# Altium PCB LM-CT-001.PcbDoc
Units mil, origin at the board's own origin, x right, y up, seen from the top; angles counter-clockwise.
Board outline 591.28 x 2078.8 mil, 4 copper layers (Top Layer, Signal Layer 2, Signal Layer 1, Bottom Layer), stack 30.634 mil thick; 41 components, 44 nets, 161 pads, 28 vias.
Unrouted connection lines stored in the file: 3.
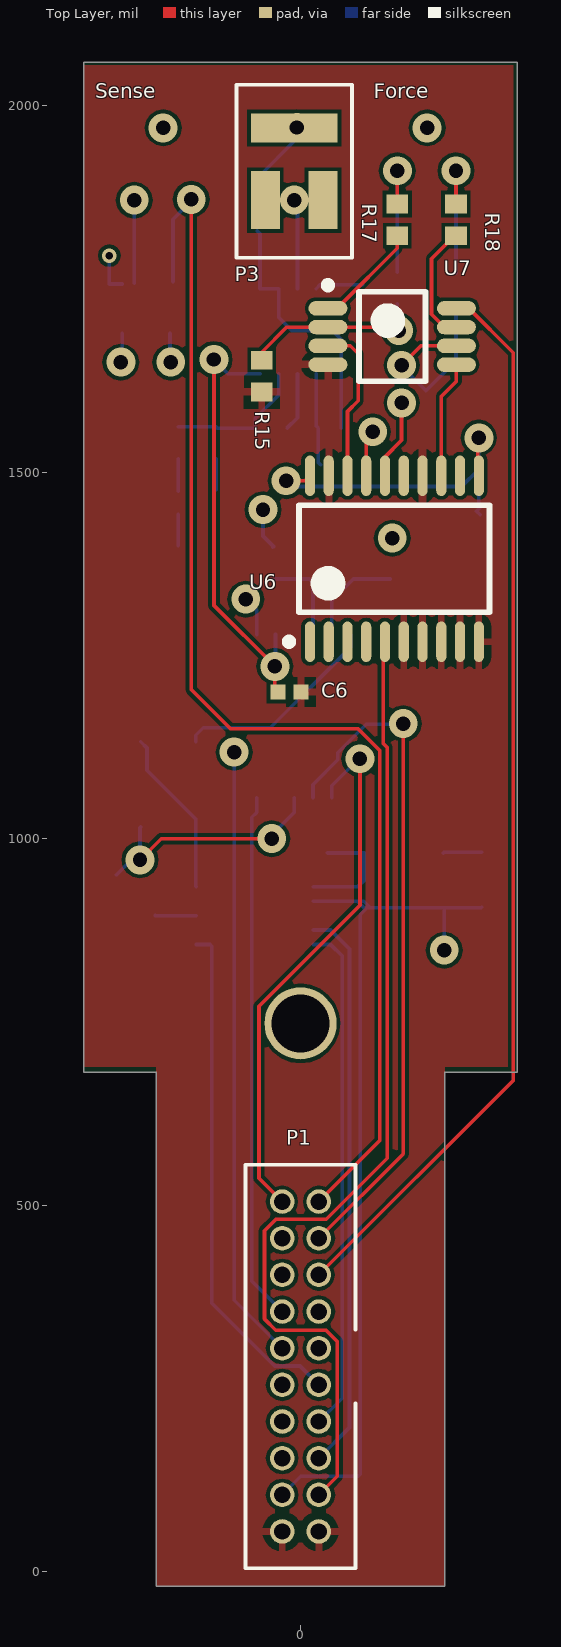
[diagram p0: Top Layer view]
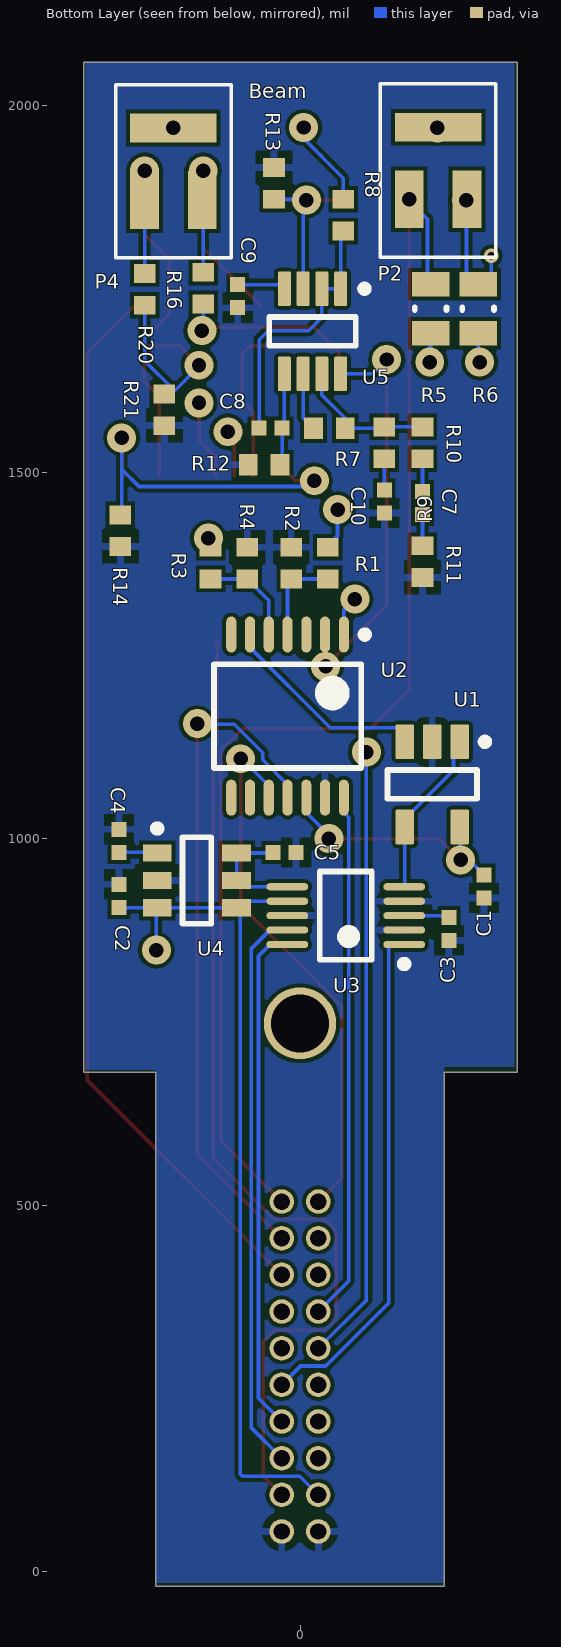
[diagram p1: Bottom Layer view, seen from below]
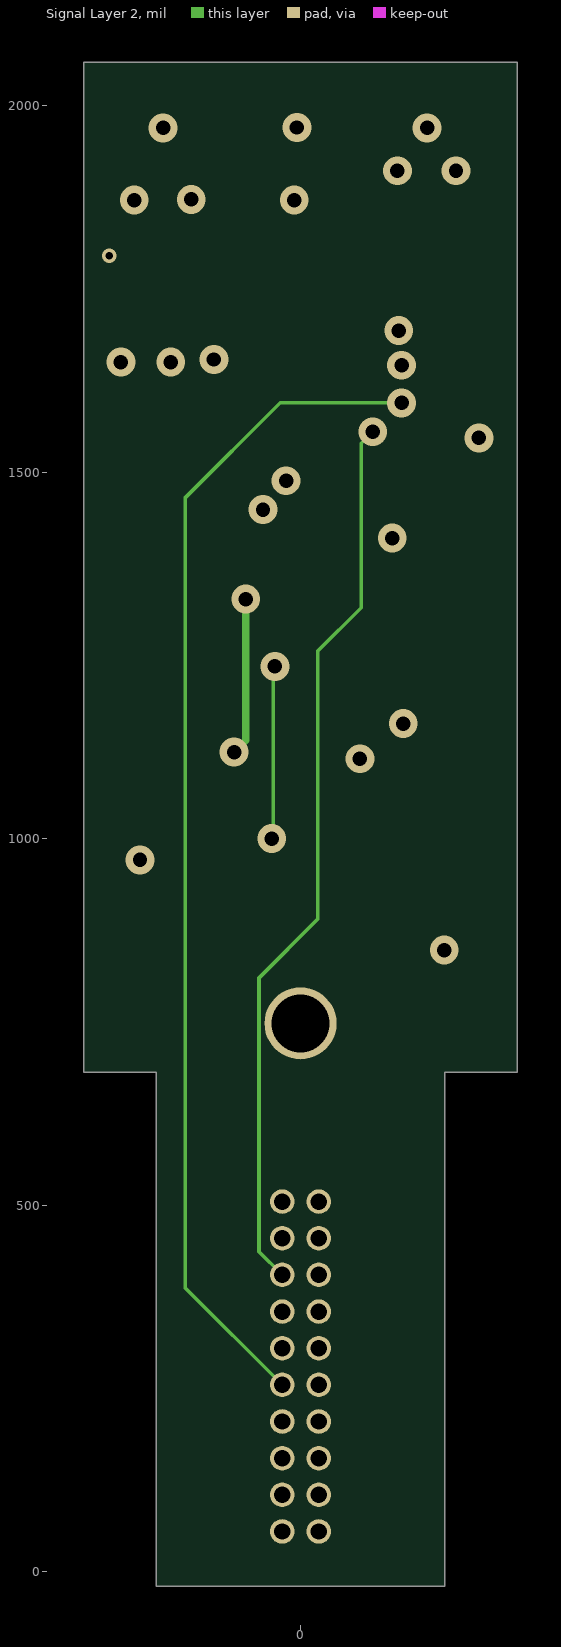
[diagram p2: Signal Layer 2]
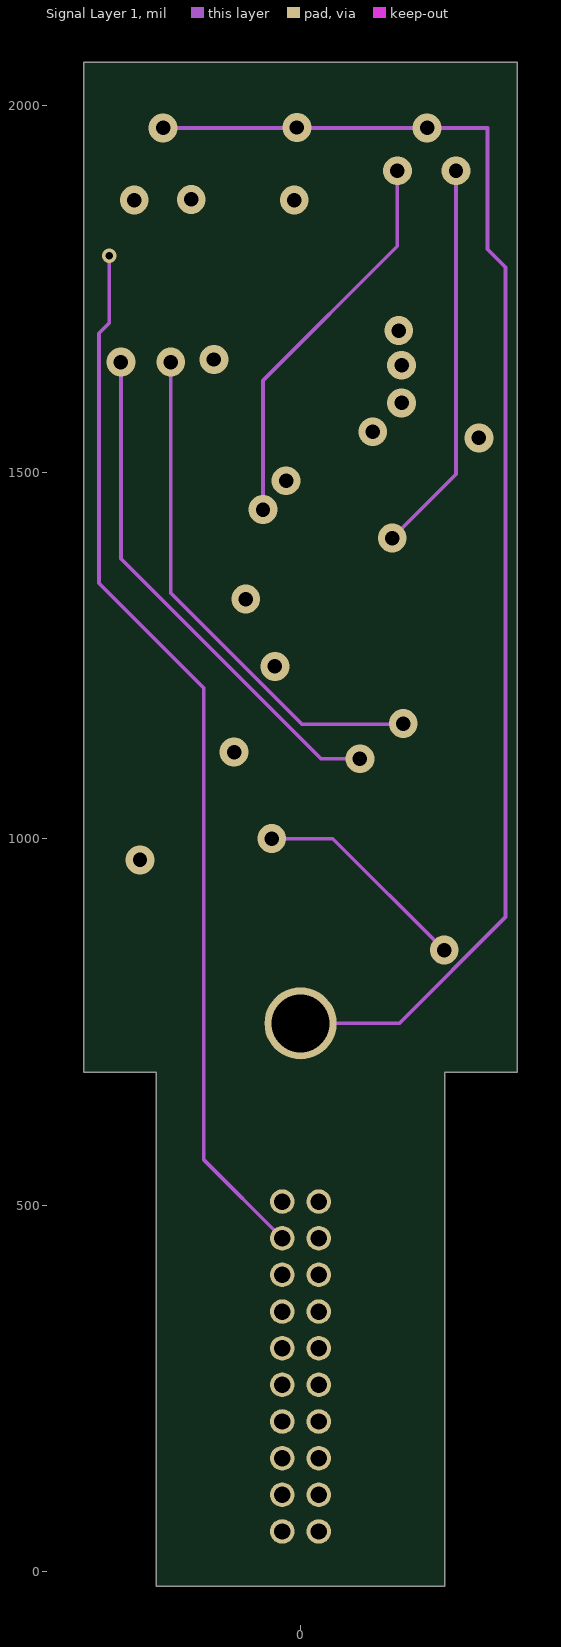
[diagram p3: Signal Layer 1]

## Layer stack, top to bottom
Top Solder: solder mask 0.4, Solder Resist, Dk 3.5
Top Layer: signal copper 1.4
Dielectric 1: core 10, FR-4, Dk 4.2
Signal Layer 2: signal copper 1.417
Dielectric 5: prepreg 5, Dk 4.2
Signal Layer 1: signal copper 1.417
Dielectric 4: core 10, Dk 4.2
Bottom Layer: signal copper 1.4
Bottom Solder: solder mask 0.4, Solder Resist, Dk 3.5

## Board outline
295.28,681.05 196.85,681.05 196.85,-20 -196.85,-20 -196.85,681.05 -296,681.05 -296,2058.8 295.28,2058.8

## Design rules (kind name [scope] priority, off if disabled: settings)
Clearance [All] p1: gap=5 ignorepadtopadclearanceinfootprint=FALSE except(0: Arc-Hole Track-Hole SMDPad-Hole THPad-Hole Via-Hole Fill-Hole Poly-Hole Region-Hole Text-Hole)
HoleToHoleClearance [All] p1: gap=5 allowstackedmicrovias=TRUE
MinimumSolderMaskSliver [All] p1: minsoldermaskwidth=2.5
PolygonConnect [All] p1: connectstyle=Relief reliefconductorwidth=10 reliefentries=4 polygonreliefangle="90 Angle" airgapwidth=10
RoutingVias [All] p1: holewidth=10 width=20 viastyle="Through Hole" minholewidth=5 minwidth=10 maxholewidth=28 maxwidth=50
SilkToSolderMaskClearance [IsPad] p1: minsilkscreentomaskgap=5 clearancetoexposedcopper=TRUE
SolderMaskExpansion [All] p1: expansion=4
Width [All] p1: maxlimit=10 minlimit=5 preferedwidth=10 toplayer_prefwidth=5 bottomlayer_prefwidth=5 minimp=50.000000 maximp=50.000000 favimp=50.000000
27 further rules are at their usual default settings.

## Classes and differential pairs
component class Beam_Amp: C6 C7 C8 C9 C10 P1 P2 P3 R5 R6 R7 R8 R9 R10 R11 R12 R13 U5
component class ADC: C1 C2 C3 C4 C5 R1 R2 R3 R4 U1 U2 U3 U4
component class ZP_Force_Plates: P4 R14 R15 R16 R17 R18 R20 R21 U6 U7

## Components (designator, comment, footprint, x,y, rotation, side; value= is the part's Value field where it differs from the comment)
C1 "0.1uF" CAPC0402(1005)60_L -251,935 r90 bottom
C2 "0.1uF" CAPC0402(1005)60_L 247,922 r270 bottom
C3 "0.1uF" CAPC0402(1005)60_L -203,877 r90 bottom
C4 "0.1uF" CAPC0402(1005)60_L 247,997 r270 bottom
C5 "0.1uF" CAPC0402(1005)60_L 21,981 r180 bottom
C6 "0.1uF" CAPC0402(1005)60_L -15,1200 r180 top
C7 "0.1uF" CAPC0402(1005)60_L -167,1458 r270 bottom
C8 "0.1uF" CAPC0402(1005)60_L 40,1560 r180 bottom
C9 "0.1uF" CAPC0402(1005)60_L 85,1740 r90 bottom
C10 "1uF" CAPC0402(1005)60_L -115,1460 r90 bottom
P1 "FTSH-110-02-F-D-ES" FTSH-110-02-F-D-ES 0,280 r90 top locked
P2 "Triax_Conn" Triax_Conn -149,1872 r180 bottom
P3 "Triax_Conn" Triax_Conn -48,1871 r0 top
P4 "Triax_Conn" Triax_Conn 212,1871 r180 bottom
R1 "100k" RESC0402(1005)_M -38,1375.91 r270 bottom
R2 "10K" RESC0402(1005)_M 12,1375.91 r90 bottom
R3 "100k" RESC0402(1005)_M 122,1375.91 r270 bottom
R4 "10k" RESC0402(1005)_M 72,1375.91 r90 bottom
R5 "100" RESC0805(2012)_L -178,1723 r270 bottom
R6 "100" RESC0805(2012)_L -243,1723 r270 bottom
R7 "" RESC0402(1005)_M -40,1560 r0 bottom
R8 "100" RESC0402(1005)_M -59.06,1850.39 r90 bottom
R9 "" RESC0402(1005)_M -167,1540 r90 bottom
R10 "" RESC0402(1005)_M -115,1540 r270 bottom
R11 "" RESC0402(1005)_M -167,1378 r270 bottom
R12 "" RESC0402(1005)_M 49,1510 r0 bottom
R13 "" RESC0402(1005)_M 35.43,1893.7 r270 bottom
R14 "3.9K" RESC0402(1005)_M 245,1420 r90 bottom
R15 "10k" RESC0402(1005)_M -53,1631 r90 top
R16 "100k" RESC0402(1005)_M 132,1751 r90 bottom
R17 "100" RESC0402(1005)_M 132,1844 r90 top
R18 "100" RESC0402(1005)_M 212,1844 r90 top
R20 "100k" RESC0402(1005)_M 212,1749.35 r90 bottom
R21 "10k" RESC0402(1005)_M 185,1585 r90 bottom
U1 "OPA188AIDBVR" DBV0005A_M -180.39,1074 r270 bottom
U2 "ADG1204YRUZ-REEL7" ADI-RU-14_L 17,1167.16 r270 bottom
U3 "MAX11100EUB+T" U10+2_L -62.39,895 r0 bottom
U4 "MAX6070AAUT41+T" SOT95P280X445-6N 140.61,943 r180 bottom
U5 "OPA2378AIDCNT" DCN0008A_M -17,1692 r270 bottom
U6 "MAX333CWP+" TSOP65P640X90-20N 127.98,1381.79 r90 top
U7 "LT6016" LT6016 125,1685 r0 top

## Footprints (in the part's own frame and the unit in brackets; to place one, negate y for a bottom-side part, rotate by r counter-clockwise, add the part's x,y. Pads: shape width x height; smd on the part's side, far side on the other; paste and mask are expansions set on the pad)
ADI-RU-14_L [mm] "SOP, 14-Leads, Body 5x4.4mm, Pitch 0.65mm, IPC High Density"
  oval 1.25x0.35 smd: 1(-2.825,1.95) 2(-2.825,1.3) 3(-2.825,0.65) 4(-2.825,0) 5(-2.825,-0.65) 6(-2.825,-1.3) 7(-2.825,-1.95) 8(2.825,-1.95) 9(2.825,-1.3) 10(2.825,-0.65) 11(2.825,0) 12(2.825,0.65) 13(2.825,1.3) 14(2.825,1.95)
  silkscreen extent -2.95,-2.55 1.8,2.8, body extent -2.25,-2.55 2.25,2.55, height 1.2
CAPC0402(1005)60_L [mm] "Chip Capacitor, Body 1.0x0.5mm, Height 0.6mm, IPC High Density"
  rect 0.52x0.52 smd: 1(-0.4,0) 2(0.4,0)
  body extent -0.55,-0.3 0.55,0.3, height 0.6
DBV0005A_M [mm] "SOT23, 5-Leads, Body 3.05x1.75mm, Pitch 0.95mm, IPC Low Density"
  rrect15% 1.2x0.65 smd: 1(-1.475,0.95) 2(-1.475,0) 3(-1.475,-0.95) 4(1.475,-0.95) 5(1.475,0.95)
  silkscreen extent -1.6,-1.55 0.5,1.95, body extent -1.42,-1.46 1.42,1.46, height 1.08
DCN0008A_M [mm] "SOT23, 8-Leads, Body 3x1.75mm, Pitch 0.65mm, IPC Low Density"
  rrect22% 1.2x0.45 smd: 1(-1.475,0.975) 2(-1.475,0.325) 3(-1.475,-0.325) 4(-1.475,-0.975) 5(1.475,-0.975) 6(1.475,-0.325) 7(1.475,0.325) 8(1.475,0.975)
  silkscreen extent -1.6,-1.5 0.5,1.92, body extent -0.88,-1.5 0.87,1.5, height 1.45
FTSH-110-02-F-D-ES [mm] "CONN HEADER VERT 20POS 1.27MM"
  round 0.85 hole 0.57: 1(-5.715,-0.635) 2(-5.715,0.635) 3(-4.445,-0.635) 4(-4.445,0.635) 5(-3.175,-0.635) 6(-3.175,0.635) 7(-1.905,-0.635) 8(-1.905,0.635) 9(-0.635,-0.635) 10(-0.635,0.635) 11(0.635,-0.635) 12(0.635,0.635) 13(1.905,-0.635) 14(1.905,0.635) 15(3.175,-0.635) 16(3.175,0.635) 17(4.445,-0.635) 18(4.445,0.635) 19(5.715,-0.635) 20(5.715,0.635)
  silkscreen extent -6.98,-1.9 6.99,1.91, body extent -7.33,-2.44 7.49,2.34, height 4.52
LT6016 [mm]
  oval 1.35x0.5 smd: 1(-2.225,0.975) 2(-2.225,0.325) 3(-2.225,-0.325) 4(-2.225,-0.975) 5(2.225,-0.975) 6(2.225,-0.325) 7(2.225,0.325) 8(2.225,0.975)
  silkscreen extent -2.35,-1.55 1.15,1.9, body extent -2.45,-1.55 2.45,1.55, height 1.1
RESC0402(1005)_M [mm] "Chip Resistor, Body 1.0x0.5mm, IPC Low Density"
  rect 0.65x0.75 smd: 1(-0.55,0) 2(0.55,0)
  body extent -0.52,-0.28 0.53,0.28, height 0.4
RESC0805(2012)_L [mm] "Chip Resistor, Body 2.0x1.3mm, IPC High Density"
  rect 0.85x1.3 smd: 1(-0.85,0) 2(0.85,0)
  silkscreen extent -0.05,-0.55 0.05,0.55, body extent -1.1,-0.67 1.1,0.68, height 0.7
SOT95P280X445-6N [mm] "SOT23, 6-Leads, Body 2.90x2.80mm, Pitch 0.95mm, IPC Medium Density"
  rect 1x0.6 smd: 1(-1.375,0.95) 2(-1.375,0) 3(-1.375,-0.95) 4(1.375,-0.95) 5(1.375,0) 6(1.375,0.95)
  silkscreen extent -1.5,-1.5 0.5,1.92, body extent -2.11,-1.78 2.11,1.73, height 1.08
Triax_Conn [mm] "Triaxial pads for Conning Tower"
  rect 1x2 smd: 1(0,0) 2(2,0)
  rect 3x1 smd: 3(1,2.5)
  silkscreen extent -1,-2 3,4
TSOP65P640X90-20N [mm] "TSOP, 20-Leads, Body 6.50x4.40mm, Pitch 0.65mm, IPC Medium Density"
  oval 1.4x0.35 smd: 1(-2.875,2.925) 2(-2.875,2.275) 3(-2.875,1.625) 4(-2.875,0.975) 5(-2.875,0.325) 6(-2.875,-0.325) 7(-2.875,-0.975) 8(-2.875,-1.625) 9(-2.875,-2.275) 10(-2.875,-2.925) 11(2.875,-2.925) 12(2.875,-2.275) 13(2.875,-1.625) 14(2.875,-0.975) 15(2.875,-0.325) 16(2.875,0.325) 17(2.875,0.975) 18(2.875,1.625) 19(2.875,2.275) 20(2.875,2.925)
  silkscreen extent -3,-3.3 1.85,3.77, body extent -2.25,-3.3 2.25,3.3, height 0.9
U10+2_L [mm] "TSSOP, 10-Leads, Body 3x3mm, Pitch 0.5mm, IPC High Density"
  oval 1.45x0.25 smd: 1(-2.025,1) 2(-2.025,0.5) 3(-2.025,0) 4(-2.025,-0.5) 5(-2.025,-1) 6(2.025,-1) 7(2.025,-0.5) 8(2.025,0) 9(2.025,0.5) 10(2.025,1)
  silkscreen extent -2.15,-1.52 0.9,1.8, body extent -1.55,-1.55 1.55,1.55, height 1.1

## Part data
C1 C2 C3 C4 C5 C6 C7 C8 C9 C10: library part CMP-1034-00252-1, "CAP CER 0.1UF 10V X7R 0402", Manufacturer="Murata Electronics North America", Manufacturer Part Number=GRM155R71A104KA01D, Operating Temperature="-55°C ~ 125°C", Package / Case="0402 (1005 Metric)", Ratings=-, Supplier Part Number 1=490-6321-1-ND, Temperature Coefficient=X7R, Tolerance=±10%, Voltage - Rated=10V, Applications="General Purpose", Category=Capacitors, ComponentLink1Description=http://www.murata.com/~/media/webrenewal/support/library/catalog/products/capacitor/mlcc/c02e.ashx?la=en-us, ComponentLink1URL=http://www.murata.com/~/media/webrenewal/support/library/catalog/products/capacitor/mlcc/c02e.ashx?la=en-us, Features=-, Height - Seated (Max)=-, Lead Spacing=-, Mounting Type="Surface Mount, MLCC", Packaging="Cut Tape (CT)", Part Status=Active, Pricing 1="1=0.1, 10=0.014, 100=0.0063, 500=0.00446, 1000=0.00351, 2500=0.00319, 5000=0.00293 (USD)", RoHS="RoHS Compliant", Size / Dimension="0.039\" L x 0.020\" W (1.00mm x 0.50mm)", Stock 1=2920395, Supplier 1=Digi-Key, Thickness (Max)="0.022\" (0.55mm)"
R1 R2 R3 R4 R7 R8 R9 R10 R11 R12 R13 R14 R15 R16 R17 R18 R20 R21: library part CMP-1011-00463-1
R5 R6: library part CMP-1013-00215-1, "RES SMD 100 OHM JUMPER 1/8W 0805"
U1: library part CMP-0809-00005-2, "Precision, Low Noise, Rail-to-Rail Output, Zero-Drift Operational Amplifier, 4 to 36 V, -40 to 125 degC, 5-pin SOT23 (DBV5), Green (RoHS & no Sb/Br)", Case/Package=SOT-23-5, Input Bias Current=160pA, Input Offset Voltage (Vos)=6uV, Input Voltage Noise Density="8.8nV/sqrt Hz", Manufacturer="Texas Instruments", Max Dual Supply Voltage=18V, Max Operating Temperature=125°C, Max Supply Voltage=36V, Min Dual Supply Voltage=2V, Min Operating Temperature=-40°C, Min Supply Voltage=4V, Nominal Supply Current=510uA, Operating Supply Current=450uA, Output Current per Channel=18mA, Package Quantity=3000, Power Supply Rejection Ratio (PSRR)=142dB, Voltage Gain=136dB, Common Mode Rejection Ratio=120dB, ComponentLink1Description=https://datasheet.ciiva.com/24017/opa188-372986-24017253.pdf, ComponentLink1URL=https://datasheet.ciiva.com/24017/opa188-372986-24017253.pdf, ComponentLink2Description=https://datasheet.ciiva.com/18622/opa188-18622375.pdf, ComponentLink2URL=https://datasheet.ciiva.com/18622/opa188-18622375.pdf, Contact Plating=Nickel,Gold, Gain Bandwidth Product=2MHz, Lead Free="Lead Free", Manufacturer Part Number=OPA188AIDBVR, Nominal Gain Bandwidth Product=2MHz, Number of Channels=1, Number of Circuits=1, Number of Elements=1, Number of Pins=5, Packaging="Tape and Reel", Pricing 1="1=2.1871, 10=1.943, 25=1.9086, 100=1.5565, 250=1.5371, 500=1.3168, 1000=1.2243 (USD)", Slew Rate=0.8V/µs, Stock 1=95, Supplier 1=Arrow, Supplier Part Number 1=OPA188AIDBVR, Unity Gain Bandwidth Product=2MHz
U2: library part CMP-0793-00109-1, "Low Capacitance, Low Charge Injection, +/-15 V / +12 V, 4:1 iCMOS Multiplexer, 120 Ohm Ron, 14-pin SOP (RU-14), Reel", Base Part Number=MAX11100, Manufacturer="Maxim Integrated", Manufacturer Part Number=MAX11100EUB+, Operating Temperature="-40°C ~ 85°C", Package / Case="10-TFSOP, 10-MSOP (0.118\", 3.00mm Width)", Supplier Device Package=10-uMAX, Supplier Part Number 1=MAX11100EUB+-ND, Voltage - Supply, Analog=5V, Voltage - Supply, Digital="2.7 V ~ 5.25 V", Architecture=SAR, Category="Integrated Circuits (ICs)", ComponentLink1Description=https://datasheets.maximintegrated.com/en/ds/MAX11100.pdf, ComponentLink1URL=https://datasheets.maximintegrated.com/en/ds/MAX11100.pdf, Configuration=S/H-ADC, Data Interface=SPI, Features=-, Input Type="Single Ended", Number of Bits=16, Number of Inputs=1, Packaging=Tube, Part Status=Active, Pricing 1="1=5.98, 10=5.855 (USD)", Ratio - S/H:ADC=1:1, Reference Type=External, RoHS="RoHS Compliant", Sampling Rate (Per Second)=200k, Stock 1=927, Supplier 1=Digi-Key
U3: library part CMP-0249-00017-1, "16-Bit, +5V, 200ksps ADC with 10uA Shutdown, 10-Pin uMAX, -40°C to +85°C, Pb-Free, Tape and Reel", Base Part Number=MAX11100, Manufacturer="Maxim Integrated", Manufacturer Part Number=MAX11100EUB+, Operating Temperature="-40°C ~ 85°C", Package / Case="10-TFSOP, 10-MSOP (0.118\", 3.00mm Width)", Supplier Device Package=10-uMAX, Supplier Part Number 1=MAX11100EUB+-ND, Voltage - Supply, Analog=5V, Voltage - Supply, Digital="2.7 V ~ 5.25 V", Architecture=SAR, Category="Integrated Circuits (ICs)", ComponentLink1Description=https://datasheets.maximintegrated.com/en/ds/MAX11100.pdf, ComponentLink1URL=https://datasheets.maximintegrated.com/en/ds/MAX11100.pdf, Configuration=S/H-ADC, Data Interface=SPI, Features=-, Input Type="Single Ended", Number of Bits=16, Number of Inputs=1, Packaging=Tube, Part Status=Active, Pricing 1="1=5.98, 10=5.855 (USD)", Ratio - S/H:ADC=1:1, Reference Type=External, RoHS="RoHS Compliant", Sampling Rate (Per Second)=200k, Stock 1=927, Supplier 1=Digi-Key
U4: "IC VREF SERIES 4.096V SOT23", Current - Supply=350µA, Manufacturer="Maxim Integrated", Operating Temperature="-40°C ~ 125°C (TA)", Package / Case=SOT-23-6, Supplier Part Number 1=MAX6070AAUT41+TCT-ND, Temperature Coefficient=6ppm/°C, Tolerance=±0.04%, Voltage - Input="4.3 V ~ 5.5 V", Voltage - Output (Min/Fixed)=4.096V, Category="Integrated Circuits (ICs)", ComponentLink1Description=https://datasheets.maximintegrated.com/en/ds/MAX6070-MAX6071.pdf, ComponentLink1URL=https://datasheets.maximintegrated.com/en/ds/MAX6070-MAX6071.pdf, Manufacturer Part Number=MAX6070AAUT41+T, Mounting Type="Surface Mount", Noise - 0.1Hz to 10Hz=9.6µVp-p, Noise - 10Hz to 10kHz=9µVrms, Output Type=Fixed, Packaging="Cut Tape (CT)", Part Status=Active, Pricing 1="1=3.41, 10=3.213, 25=2.5704, 50=2.4418, 100=2.2491, 250=2.13344, 500=2.05634 (USD)", Reference Type=Series, RoHS="RoHS Compliant", Stock 1=2623, Supplier 1=Digi-Key, Supplier Device Package=SOT-23-6
U5: library part CMP-0272-01124-3, "Low-Noise, 900 kHz, RRIO, Precision Operational Amplifier, Zero-Drift Series, 2.2 to 5.5 V, -40 to 125 degC, 8-pin SOP (DCN8), Green (RoHS & no Sb/Br)", Manufacturer="Texas Instruments", Total Supply Voltage(Max)(+5V is 5, +/-5V is 10)=5.5, Total Supply Voltage(Min)(+5V is 5, +/-5V is 10)=2.2, CMRR(Min)(dB)=100, Code_JEDEC=MO-178, ComponentLink1Description="Manufacturer URL", ComponentLink1URL=http://www.ti.com/, ComponentLink2Description=Datasheet, ComponentLink2URL=http://www.ti.com/general/docs/lit/getliterature.tsp?genericPartNumber=OPA2378&fileType=pdf, ComponentLink3Description="Package Specification", ComponentLink3URL=http://www.ti.com/lit/ml/mpds099c/mpds099c.pdf, DatasheetVersion=SBOS417D, Eco-Plan="Green (RoHS & no Sb/Br)", IIB(Max)(pA)=550, Iq per channel(Max)(mA)=0.15, Mounting Technology="Surface Mount", Number of Channels=2, Offset Drift(Typ)(uV/C)=0.25, PackageDescription="8-Pin Plastic Small Outline, Body 1.6 x 2.9 mm, Pitch 0.65 mm", PackageReference=DCN0008A, PackageVersion="4202106/D, 11/2009", PartId=1, PartNumber=OPA2378AIDCNT, Slew Rate(Typ)(V/us)=0.4, Sub Family="Low Offset Voltage Amplifier (<=500uV), Low Power Amp (<=500uA), Low Supply Voltage Amplifier (<=2.7V), Precision Amplifier, Zero Drift Precision Amplifier", Vio (25C)(Max)(mV)=0.07, Vn at 1kHz(Typ)(nV/rtHz)=20
U6: "IC SWITCH QUAD SPDT 20TSSOP", Case/Package=TSSOP, Dual Supply Voltage=15V, Manufacturer=Maxim, Manufacturer Part Number=MAX333AEUP+, Max Dual Supply Voltage=20V, Max Operating Temperature=85°C, Max Power Dissipation=559mW, Max Supply Current=250uA, Max Supply Voltage=30V, Min Dual Supply Voltage=4.5V, Min Operating Temperature=-40°C, Min Supply Voltage=10V, On-State Resistance=35R, Operating Supply Current=1uA, Package Quantity=74, Supplier Part Number 1=700-MAX333AEUP, ComponentLink1Description=https://datasheet.ciiva.com/2978/max333a-2978850.pdf, ComponentLink1URL=https://datasheet.ciiva.com/2978/max333a-2978850.pdf, ComponentLink2Description=https://datasheet.ciiva.com/30478/0900766b81253c85-30478260.pdf, ComponentLink2URL=https://datasheet.ciiva.com/30478/0900766b81253c85-30478260.pdf, ComponentLink3Description=https://datasheet.ciiva.com/1674/max333a-1674617.pdf, ComponentLink3URL=https://datasheet.ciiva.com/1674/max333a-1674617.pdf, ComponentLink4Description=https://datasheet.ciiva.com/26825/max333aeup-26825546.pdf, ComponentLink4URL=https://datasheet.ciiva.com/26825/max333aeup-26825546.pdf, Height=0.95mm, Lead Free="Lead Free", Length=6.6mm, Number of Bits=4, Number of Channels=4, Number of Pins=20, Packaging=Rail/Tube, Pricing 1="1=6.77, 10=6.43, 50=5.8, 100=5.8, 1000=5.62, 10000=5.62 (USD)", Radiation Hardening=No, REACH SVHC=Unknown, Stock 1=664, Supplier 1=Mouser, Supply Type=Single,Dual, Throw Configuration=SPDT, Turn-Off Delay Time=145ns, Turn-On Delay Time=175ns, Weight=0.006737oz, Width=4.5mm
U7: "IC OPAMP GP 3.3MHZ RRO 8MSOP", Supplier Part Number 1=LT6016IMS8#PBF, Supplier 1=Arrow

## Free pads (board coordinates)
  round 98.43 hole 78.74: 3(0,748.03)

## Via types
v1: diameter 39.37, hole 19.68, Top Layer to Bottom Layer, 27 vias
v2: diameter 20, hole 10, Top Layer to Bottom Layer, 1 vias

## Nets (pads, with @x,y where several pads share a name; then routed paths per layer and width w, separated by ;. In a path a pad name is that pad's centre, name@x,y a point inside that pad or via, vN(x,y) a via of type N, cw(c..) or ccw(c..) an arc to the next point about the centre after c; other vN are vias at no path point)
+3.3: C3.2 U3.3 | length 56
  Bottom Layer w5: C3.2@-198,895.25 -197.75,895 U3.3
+5: C1.2 C2.2 C6.2 P1.4 U1.5 U2.2 U2.12 U3.7 U4.3 U4.4 U5.8 | length 2708.5
  Top Layer w5: v1(-219,971) -190,1000 v1(-39.37,1000) ; v1(-118.11,1653.54) -118.11,1318.11 v1(-35,1235) -35,1204.25 C6.2
  Signal Layer 1 w5: v1(-39.37,1000) 44,1000 v1(196,848)
  Signal Layer 2 w5: v1(-39.37,1000) -37.19,1002.18 -37.19,1237.19 -39.37,1239.37 v1(-35,1235)
  Bottom Layer w5: C1.2 -237.32,964.42 -225.58,964.42 v1(-219,971) -219,1014.72 U1.5 ; v1(-118.11,1653.54) -98.5,1633.93 U5.8 ; v1(-39.37,1000) -39.37,1005.07 -8.59,1035.84 U2.12 ; v1(-35,1235) -34.18,1235.82 U2.2 ; P1.4 0.2,130.2 78.5,130.2 81.43,133.13 81.43,896.29 90.74,905.6 U4.4@95.24,905.6 ; U3.7 U4.4@77.39,914.68 ; v1(196,848) 196,904.34 U4.3 ; C2.2@247,906.41 246.19,905.6 U4.3 ; U4.4@77.39,914.68 U4.4 U4.4@95.24,905.6 ; U4.4@77.39,914.68 86.16,914.68 U4.4@95.24,905.6 ; U4.4@95.24,905.6 U4.3
+12: P1.10 U6.16 | length 1722.4
  Top Layer w5: U6.16 115.19,1520.7 137.8,1543.31 v1(137.8,1594.49)
  Signal Layer 2 w5: P1.10 -157.48,387.48 -157.48,1464.57 -27.56,1594.49 v1(137.8,1594.49)
-5: C9.2 P1.3 U5.4 U6.5 | length 1434
  Top Layer w5: P1.3 50.16,130.16 50.16,314.11 34.73,329.54 -33.81,329.54 -49.23,344.96 -49.23,465.04 -33.51,480.76 35.04,480.76 118.19,563.91 118.19,1124.4 112.81,1129.77 112.81,1266.22 U6.5
  Bottom Layer w5: U5.4 27.06,1755.75 C9.2
A0: P1.12 U2.1 | length 1110.1
  Signal Layer 2 w10: v1(-90.55,1118.11) -74.8,1133.86 v1(-74.8,1326.77)
  Bottom Layer w5: v1(-90.55,1118.11) -90.55,370.55 P1.12 ; v1(-74.8,1326.77) -59.77,1311.74 U2.1
A1: P1.14 U2.14 | length 721
  Bottom Layer w5: U2.14 -59.77,1035.84 -66.56,1029.06 -66.56,396.56 P1.14
"ADC REF": C5.1 U3.6 U4.5 U4.6 | length 160.1
  Bottom Layer w5: U3.6 77.84,934.37 U4.5 U4.6 37.35,980.4 C5.1
Analog_Mux_Out: U1.3 U2.6 | length 287.4
  Bottom Layer w5: U1.3 -142.99,1140.98 -132.7,1151.27 -41.21,1151.27 68.18,1260.66 U2.6
BEAM: C7.2 R11.1 | length 42.6
  Bottom Layer w5: R11.1@-167,1399.66 C7.2
Beam_In: P3.1 P3.2 R13.2 U5.3 | length 246
  Top Layer w5: P3.1 v1(-8.63,1871) P3.2
  Bottom Layer w5: U5.3 -4.2,1866.57 v1(-8.63,1871) -7.58,1872.05 R13.2
BFP: U6.13 U7.5 | length 160.2
  Top Layer w5: U6.13 191.96,1603.24 212.6,1623.88 U7.5
"Bottom Forcing Plate Force": R18.1 U7.7 | length 163.5
  Top Layer w5: R18.1 210.03,1822.35 178.52,1790.84 178.52,1715.14 195.87,1697.79 U7.7
"Bottom Forcing Plate Sense": P4.1 R3.1 R18.2 R20.2 | length 722.4
  Top Layer w5: R18.2 v1(212,1911)
  Signal Layer 1 w5: v1(125,1410) 212,1497 v1(212,1911)
  Bottom Layer w5: R20.2 v1(212,1911)
CT_CS0: P1.5 U3.9 | length 771.9
  Bottom Layer w5: U3.9 40.95,875.31 66.71,849.56 66.71,196.71 P1.5
GND: C1.1 C2.1 C3.1 C4.1 C5.2 C6.1 C9.1 C10.1 P1.1 P1.2 R2.2 R4.2 R11.2 R12.2 R13.1 R14.1 R15.1 R21.1 U1.2 U2.3 U2.13 U3.2 U3.4 U3.8 U4.2 U6.6 U6.7 U6.8 U6.9 U6.10 U6.14 U6.19 U7.4
Guard: P2.3 P3.3 P4.3 pad.3 R8.2 | length 1973.8
  Signal Layer 1 w5: v1(-187.37,1969.42) v1(172.63,1969.43) 254.98,1969.43 254.98,1804.07 279.53,1779.53 279.53,893.08 134.48,748.03 pad.3
  Bottom Layer w5: R8.2 -59.06,1900.95 v1@-5,1955
  other v1: -5,1970
NetC4_2: C4.2 U4.1 | length 52.6
  Bottom Layer w5: U4.1 195.59,981.25 C4.2
NetC7_1: C7.1 R9.1 | length 44.6
  Bottom Layer w5: C7.1 R9.1
NetC8_1: C8.1 R8.1 U5.1 U5.2 | length 363.6
  Bottom Layer w5: R8.1 -55.38,1825.07 U5.1 U5.2 -29.79,1710.9 -11.81,1692.91 43.31,1692.91 55.75,1680.47 C8.1
NetC8_2: C8.2 R12.1 U5.5 | length 126.4
  Bottom Layer w5: U5.5 21.39,1562.86 C8.2 24.25,1513.09 R12.1
NetC10_2: C10.2 R10.2 | length 42.6
  Bottom Layer w5: C10.2 R10.2
NetR1_2: R1.2 R2.1 U2.4 | length 127.9
  Bottom Layer w5: R1.2 R2.1 17,1349.25 U2.4
NetR3_2: R3.2 R4.1 U2.5 | length 138.1
  Bottom Layer w5: U2.5 42.59,1324.84 R4.1 R3.2
NetR7_1: R7.1 R9.2 R10.1 U5.7 | length 193.2
  Bottom Layer w5: R9.2 R10.1 -113.35,1560 R7.1 -61.65,1573.34 -29.79,1605.2 U5.7
NetR7_2: R7.2 U5.6 | length 79.8
  Bottom Layer w5: R7.2 -4.2,1574.14 U5.6
NetR14_2: R14.2 U6.11 U6.20 | length 485.5
  Top Layer w5: v1(-19.69,1488.19) 6.04,1488.19 U6.20 ; U6.11 240,1494.98 241.57,1496.55 241.57,1548.43 v1(243.29,1546.71)
  Bottom Layer w5: v1(-19.69,1488.19) -19.69,1480.31 219.66,1480.31 243.29,1503.94 ; v1(243.29,1546.71) 243.29,1453.37 245,1451.65 240,1446.65 R14.2
NetR15_2: R15.2 R16.1 U7.2 | length 264.3
  Top Layer w5: R15.2@-51.23,1654.42 R15.2 -53,1663.53 -18.74,1697.79 U7.2 128.98,1697.79 v1(133.86,1692.91) v1@127.06,1692.91
  Bottom Layer w5: R16.1 132,1691 v1(133.86,1692.91) v1(133.86,1692.91)
NetR20_1: R20.1 R21.2 U7.6 | length 267.9
  Top Layer w5: v1(137.8,1645.67) 164.33,1672.2 U7.6
  Bottom Layer w5: v1(137.8,1645.67) 137.8,1644.2 171,1611 212,1652 R20.1
NetU1_1: U1.1 U1.4 U3.5 | length 229
  Bottom Layer w5: U1.1 -209.42,1123.69 -209.42,1093.18 -142.99,1026.76 -142.99,935.24 U3.5
PLATE_N_F: P1.20 R6.2 U2.10 | length 1491.6
  Top Layer w5: P1.20 -56.71,536.71 -56.71,771.52 81,909.24 v1(81,1109)
  Signal Layer 1 w5: v1(-245,1650) -245,1381.81 27.81,1109 v1(81,1109)
  Bottom Layer w5: v1(-245,1650) -243,1652 R6.2 ; U2.10 42.59,1072.12 79.47,1109 v1(81,1109)
PLATE_N_S: P1.18 P2.2 R6.1 | length 1619.7
  Signal Layer 1 w5: v2(-260.84,1795.2) -260.84,1703.2 -274.84,1689.2 -274.84,1348.2 -131.84,1205.2 -131.84,561.84 P1.18
  Bottom Layer w5: v2(-260.84,1795.2) -260.84,1756.46 R6.1 ; R6.1@-227,1757.46 -227,1870.74 v1(-226.74,1871)
PLATE_P_F: P1.17 R5.2 U2.11 | length 1685.4
  Top Layer w5: P1.17 140,570 v1(140,1157) v1@149.13,1157
  Signal Layer 1 w5: v1(-177,1650) -177,1335.02 2.02,1156 v1@140,1156
  Bottom Layer w5: R5.2 -178,1651 v1(-177,1650) ; U2.11 17,1073.65 50.83,1107.48 50.83,1117.27 89.56,1156 v1@140,1156
PLATE_P_S: P1.19 P2.1 R5.1 | length 1732.3
  Top Layer w5: v1(-149,1872) -149,1203.36 -95.37,1149.73 78.71,1149.73 108.18,1120.26 108.18,588.18 P1.19
  Bottom Layer w5: R5.1@-174,1759.46 -174,1845 P2.1@-148,1871
PWM1A: P1.13
PWM2B_DELAY: P1.8
SPI0_MOSI: P1.11
SPIO_MISO: P1.9 U3.1 | length 701
  Bottom Layer w5: U3.1 -123.23,855.63 -121,853.39 -121,366.73 -35.04,280.77 -0.77,280.77 P1.9
SPIO_SCLK: P1.7 U3.10 | length 693.9
  Bottom Layer w5: U3.10 40.95,855.63 56.71,839.87 56.71,236.71 P1.7
Sync_clk: P1.6
TFP: U6.18 U7.3 | length 218.4
  Top Layer w5: U7.3 67.95,1672.2 78.74,1661.42 78.74,1597.41 64.01,1582.68 U6.18
"Top Forcing Plate Force": R17.1 U7.1 | length 126.5
  Top Layer w5: U7.1@54.65,1727.88 132,1805.22 R17.1
"Top Forcing Plate Sense": P4.2 R1.1 R16.2 R17.2 | length 779.3
  Top Layer w5: R17.2 v1(132,1911)
  Signal Layer 1 w5: v1(-51.18,1448.82) -51.18,1624.82 132,1808 v1(132,1911)
  Bottom Layer w5: v1(-51.18,1448.82) -51.18,1412.74 -37,1398.56 R1.1 ; R16.2 v1(132,1911)
ZH: P1.16 U6.12 U6.17 | length 1291.3
  Top Layer w5: U6.17 89.6,1546.29 v1(98.43,1555.12)
  Signal Layer 2 w5: P1.16 -56.71,436.71 -56.71,809.99 23.62,890.33 23.62,1255.91 82.68,1314.96 82.68,1539.37 v1(98.43,1555.12)
ZP: P1.15 U7.8 | length 1483.2
  Top Layer w5: P1.15 290,670 290,1662.72 228.31,1724.41 U7.8@199.84,1724.41
pads on no net: U2.7 U2.8 U2.9 U6.1 U6.2 U6.3 U6.4 U6.15

## Polygon pours and split planes (outlines as drawn)
GND on Top Layer "GND_L01_P004" (solid, pour order 4): -295,2055 290,2055 290,688.98 196.85,688.98 196.85,-20 -196.85,-20 -196.85,688.98 -295,688.98
GND on Bottom Layer "GND_L04_P006" (solid, pour order 6): -292.5,2060 292.5,2060 292.5,685 196.85,685 196.85,-15 -196.85,-15 -196.85,688.98 -292.5,688.98

## Silkscreen, mask and mechanical layers (free items; w line width, h text height)
Top Overlay:
  text "Sense" at -280,2010 h20
  text "Force" at 100,2010 h20
Bottom Overlay:
  text "Beam" at 70,2010 h20

## Dimensions
-196.85,-20 to -296,681.05 on Mechanical 13
-196.85,-20 to 196.85,-20 on Mechanical 13
-296,681.05 to -296,2058.8 on Mechanical 13
-295,2059 to 295,2059 on Mechanical 13